# EAGLE board Source dc voltage and dc current (EAGLE 9.6.2)
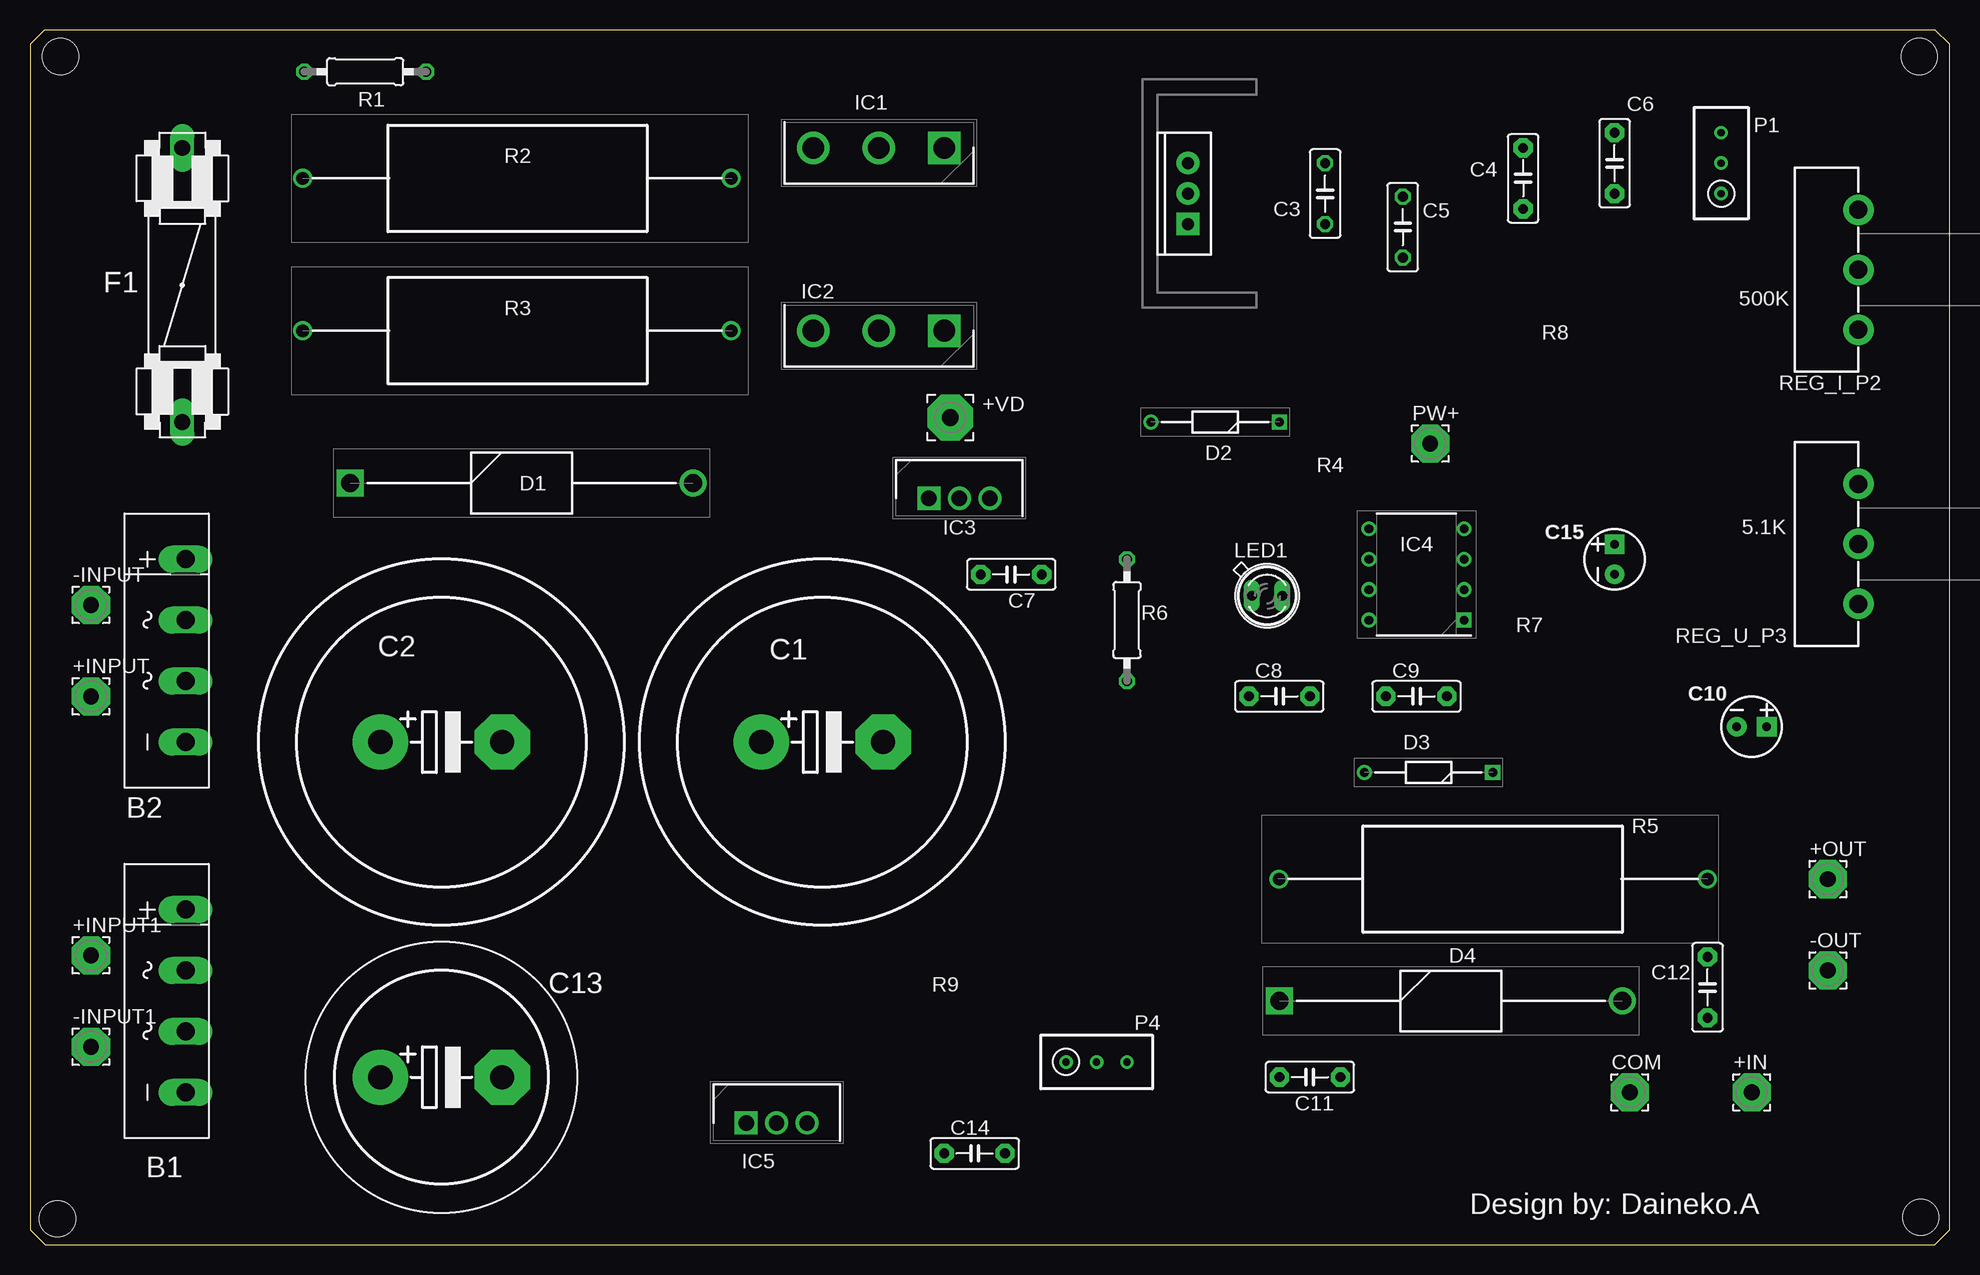
[diagram p0: board, top side]
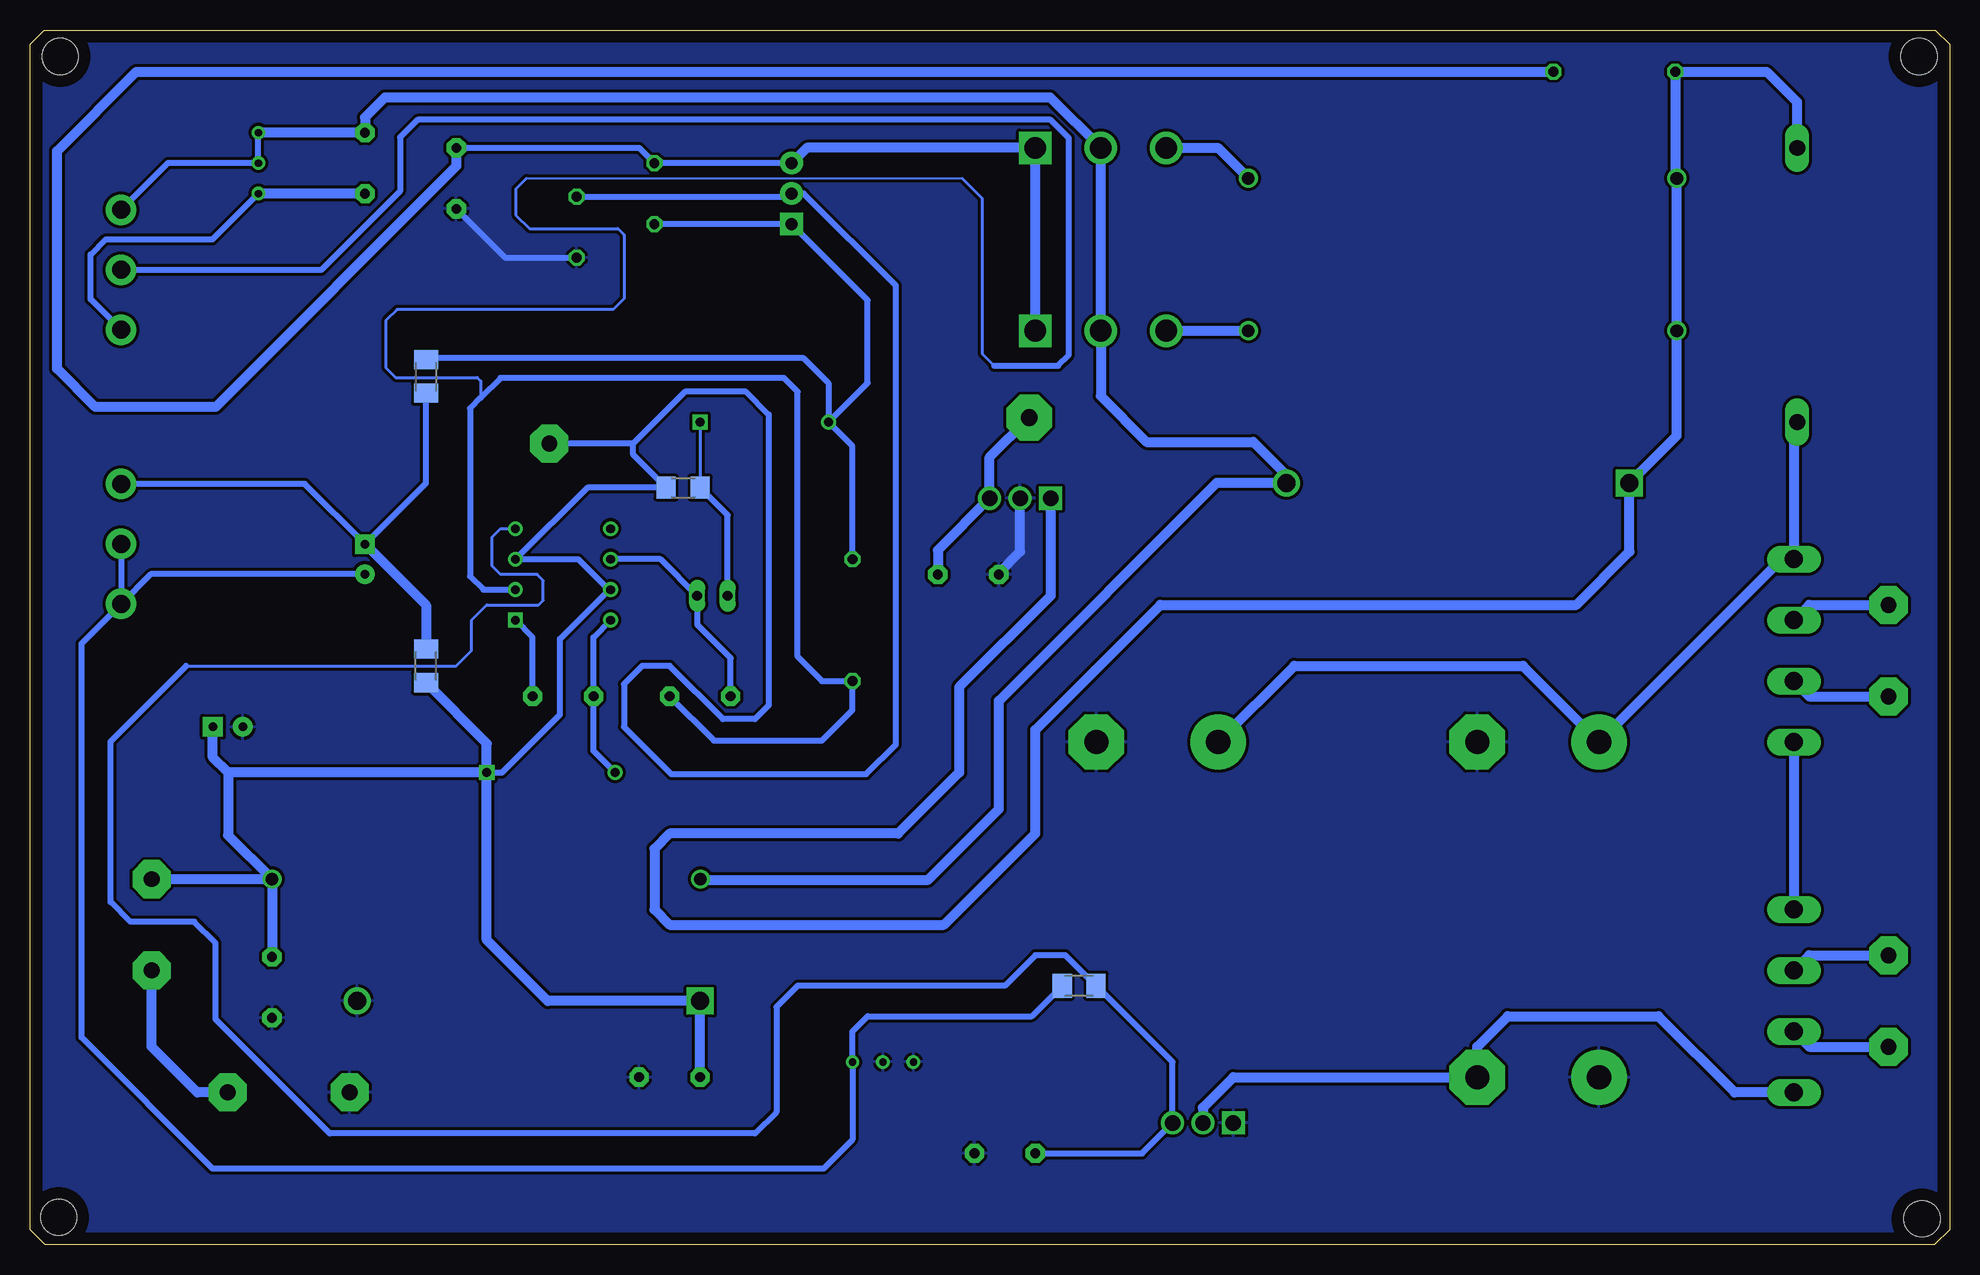
[diagram p1: board, bottom side, seen from below]

Size 160 x 101.27 mm. Coordinates in mm from the lower left corner, seen from the top.
Outline: 0,100.08 0,1.27 1.27,0 158.75,0 160,1.25 160,100.1 158.83,101.27 1.19,101.27 0,100.08
Copper layers (1*16): Top 0.035mm / dielectric 1.5mm / Bottom 0.035mm
Design rules "default *": minimum track width 6mil, minimum drill 0.35mm, track to track 10mil, track to pad 10mil, pad to pad 8mil, via to via 6mil, smd to smd 10mil, copper to edge 40mil, drill to drill 6mil, minimum pad ring 10mil, minimum via ring 8mil, stop-mask expansion 4mil, vias tented up to drill 0mil, thermal gap 10mil
Holes 3 mm at 157.48,99.06 2.54,99.06 157.61,2.29 2.29,2.16

## Footprints (pad centres in the part's own frame; a part is rotated, then mirrored left to right if it is on the bottom)
3,17/1,3 = drill 1.321 pad 3.175 octagon: 1 0,0
3,81/1,4 = drill 1.397 pad 3.81 octagon: 1 0,0
FBU4 = drill 1.499 long: + 7.62,-1.54; - -7.62,-1.54; AC1 2.54,-1.54; AC2 -2.54,-1.54
EB30D = drill 2.007 pad 4.597: + -5.08,0 | drill 2.007 pad 4.597 octagon: - 5.08,0
C050-025X075 = drill 0.813 octagon: 1 -2.54,0; 2 2.54,0
C5B2.5 = drill 0.813 pad 1.6 octagon: 1 -2.54,0; 2 2.54,0
CPOL-RADIAL-2.5MM-5MM = drill 0.7 pad 1.651 square: 1 1.25,0 | drill 0.7 pad 1.651: 2 -1.25,0
EB22,5D = drill 2.007 pad 4.597: + -5.08,0 | drill 2.007 pad 4.597 octagon: - 5.08,0
DIOAD2860W130L840D505 = drill 1.5 pad 2.25 square: 1 0,0 | drill 1.5 pad 2.25: 2 28.6,0
DIOAD1068W53L380D172 = drill 0.75 pad 1.15 square: 1 0,0 | drill 0.75 pad 1.15: 2 10.7,0
FUSE = drill 1.321 long: 1 -11.43,0; 2 11.43,0
TO545P515X1560X2445-3P = drill 1.81 pad 2.715 square: 1 0,0 | drill 1.81 pad 2.715: 2 5.45,0; 3 10.9,0
TO254P470X1028X1955-3P = drill 1.29 pad 1.935 square: 1 0,0 | drill 1.29 pad 1.935: 2 2.54,0; 3 5.08,0
DIP794W53P254L959H508Q8N = drill 0.73 pad 1.13 square: 1 -3.97,3.81 | drill 0.73 pad 1.13: 2 -3.97,1.27; 3 -3.97,-1.27; 4 -3.97,-3.81; 5 3.97,-3.81; 6 3.97,-1.27; 7 3.97,1.27; 8 3.97,3.81
SFH482 = drill 0.813 long: A -1.27,0; K 1.27,0
RTRIM3296W = drill 0.61: 1 0,-2.54; 2 0,0; 3 0,2.54
0207/10 = drill 0.813 octagon: 1 -5.08,0; 2 5.08,0
RESAD6200W85L2200D1000 = drill 1.05 pad 1.575: 1 -0.127,0; 2 35.584,0
R1206 = smd 1.6 x 1.803: 1 -1.422,0; 2 1.422,0
M1206 = smd 1.6 x 2: 1 -1.4,0; 2 1.4,0
POT_ALPHA_RV16AF-20 = drill 1.5 pad 2.54: 1 -5,0; 2 0,0; 3 5,0
TO220-ADJ = drill 1 pad 1.88 square: ADJ -2.54,0 | drill 1 pad 1.88: IN 2.54,0; OUT 0,0

## Placement (x,y rotation side)
+IN  [3,17/1,3]  143.51,12.7 0 top
+INPUT  [3,17/1,3]  5.08,45.72 0 top
+INPUT1  [3,17/1,3]  5.08,24.13 0 top
+OUT  [3,17/1,3]  149.86,30.48 0 top
+VD  [3,81/1,4]  76.71,68.96 270 top
-INPUT  [3,17/1,3]  5.08,53.34 0 top
-INPUT1  [3,17/1,3]  5.08,16.51 0 top
-OUT  [3,17/1,3]  149.86,22.86 0 top
B1  [FBU4]  11.43,20.32 90 top
B2  [FBU4]  11.43,49.53 90 top
C1  10000uF  [EB30D]  66.04,41.91 0 top
C2  10000uF  [EB30D]  34.29,41.91 0 top
C3  68n  [C050-025X075]  107.95,87.63 270 top
C4  0.33uF  [C5B2.5]  124.46,88.9 90 top
C5  1.0uF  [C050-025X075]  114.43,84.84 90 top
C6  100pF  [C5B2.5]  132.08,90.17 270 top
C7  0.1uF  [C5B2.5]  81.79,55.88 180 top
C8  100pF  [C5B2.5]  104.14,45.72 0 top
C9  100pF  [C5B2.5]  115.57,45.72 0 top
C10  10uF  [CPOL-RADIAL-2.5MM-5MM]  143.51,43.18 0 top
C11  0.22uF  [C5B2.5]  106.68,13.97 180 top
C12  10nF  [C5B2.5]  139.83,21.46 270 top
C13  1000uF  [EB22,5D]  34.29,13.97 0 top
C14  0.1uF  [C5B2.5]  78.74,7.62 0 top
C15  10uF  [CPOL-RADIAL-2.5MM-5MM]  132.08,57.15 90 top
COM  [3,17/1,3]  133.35,12.7 0 top
D1  1N5408RLG  [DIOAD2860W130L840D505]  26.67,63.5 0 top
D2  1N914  [DIOAD1068W53L380D172]  104.14,68.58 180 top
D3  1N914  [DIOAD1068W53L380D172]  121.92,39.37 180 top
D4  1N5408RLG  [DIOAD2860W130L840D505]  104.14,20.32 0 top
F1  [FUSE]  12.7,80.01 90 top
IC1  TIP35C  [TO545P515X1560X2445-3P]  76.2,91.44 180 top
IC2  TIP35C  [TO545P515X1560X2445-3P]  76.2,76.2 180 top
IC3  LM7812CT_NOPB  [TO254P470X1028X1955-3P]  74.93,62.23 0 top
IC4  LM301AN_NOPB  [DIP794W53P254L959H508Q8N]  115.57,55.88 180 top
IC5  LM7905CT_NOPB  [TO254P470X1028X1955-3P]  59.69,10.16 0 top
LED1  SFH482  [SFH482]  103.12,54.1 0 top
P1  470K  [RTRIM3296W]  140.97,90.17 0 top
P4  100  [RTRIM3296W]  88.9,15.24 270 top
PW+  [3,17/1,3]  116.71,66.8 0 top
R1  30 2W  [0207/10]  27.94,97.79 0 top
R2  SQPW5R10J  [RESAD6200W85L2200D1000]  22.86,88.9 0 top
R3  SQPW5R10J  [RESAD6200W85L2200D1000]  22.86,76.2 0 top
R4  680  [R1206]  105.56,63.12 180 bottom
R5  SQPW5R10J  [RESAD6200W85L2200D1000]  139.7,30.48 180 top
R6  330 2W  [0207/10]  91.44,52.07 270 top
R7  220  [M1206]  127,48.26 270 bottom
R8  220  [M1206]  127,72.39 90 bottom
R9  200  [M1206]  72.55,21.59 0 bottom
REG_I_P2  500K  [POT_ALPHA_RV16AF-20]  152.4,81.28 90 top
REG_U_P3  5.1K  [POT_ALPHA_RV16AF-20]  152.4,58.42 90 top
U1  V_REG_317SINK  [TO220-ADJ]  96.52,87.63 90 top

## Library data of the parts
+IN +INPUT +INPUT1 +OUT +VD -INPUT -INPUT1 -OUT COM PW+ = wirepad
B1 B2 = rectifier
C1-C3 C5 C13 = rcl; SPICEPREFIX: C
C4 C6-C9 C11 C12 C14 = capacitor-wima
C10 C15 = SparkFun-Capacitors; PROD_ID: CAP-08440
D1 D4 = SamacSys_Parts; ARROW_PART_NUMBER: 1N5408RLG; ARROW_PRICE-STOCK: https://www.arrow.com/en/products/1n5408rlg/on-semiconductor; HEIGHT: mm; MANUFACTURER_NAME: ON Semiconductor; MANUFACTURER_PART_NUMBER: 1N5408RLG; MOUSER_PART_NUMBER: 863-1N5408RLG; MOUSER_PRICE-STOCK: https://www.mouser.co.uk/ProductDetail/ON-Semiconductor/1N5408RLG?qs=y2kkmE52mdN24wKCVTkxVw%3D%3D
D2 D3 = SamacSys_Parts; ARROW_PART_NUMBER: 1N914; ARROW_PRICE-STOCK: https://www.arrow.com/en/products/1n914/on-semiconductor; DESCRIPTION: Small Signal Diode; HEIGHT: mm; MANUFACTURER_NAME: ON Semiconductor; MANUFACTURER_PART_NUMBER: 1N914; MOUSER_PART_NUMBER: 512-1N914; MOUSER_PRICE-STOCK: https://www.mouser.co.uk/ProductDetail/ON-Semiconductor-Fairchild/1N914?qs=NSEUUqpg2uCfNuQFcxVZsA%3D%3D
F1 = special
IC1 IC2 = SamacSys_Parts; ARROW_PART_NUMBER: TIP35C; ARROW_PRICE-STOCK: https://www.arrow.com/en/products/tip35c/stmicroelectronics; DESCRIPTION: TIP35C, NPN Bipolar Transistor, 25 A 100 V HFE:10 3 MHz Power, 3-Pin TO-247; HEIGHT: 5.15mm; MANUFACTURER_NAME: STMicroelectronics; MANUFACTURER_PART_NUMBER: TIP35C; MOUSER_PART_NUMBER: 511-TIP35C; MOUSER_PRICE-STOCK: https://www.mouser.co.uk/ProductDetail/STMicroelectronics/TIP35C?qs=ljbEvF4DwOMWoKR%2FCFhSgA%3D%3D
IC3 = SamacSys_Parts; ARROW_PART_NUMBER: LM7812CT/NOPB; ARROW_PRICE-STOCK: https://www.arrow.com/en/products/lm7812ctnopb/texas-instruments; DESCRIPTION: Texas Instruments LM7812CT/NOPB Positive Voltage Regulator, 1A, 12 V 3-Pin, TO-220; HEIGHT: 4.7mm; MANUFACTURER_NAME: Texas Instruments; MANUFACTURER_PART_NUMBER: LM7812CT/NOPB; MOUSER_PART_NUMBER: 926-LM7812CT/NOPB; MOUSER_PRICE-STOCK: https://www.mouser.co.uk/ProductDetail/Texas-Instruments/LM7812CT-NOPB?qs=OYMYEaN9QmBofCpFKHiRuQ%3D%3D
IC4 = SamacSys_Parts; ARROW_PART_NUMBER: LM301AN/NOPB; ARROW_PRICE-STOCK: https://www.arrow.com/en/products/lm301annopb/texas-instruments; DESCRIPTION: Texas Instruments LM301AN/NOPB Op Amp, 8-Pin MDIP; HEIGHT: 5.08mm; MANUFACTURER_NAME: Texas Instruments; MANUFACTURER_PART_NUMBER: LM301AN/NOPB; MOUSER_PART_NUMBER: 926-LM301AN/NOPB; MOUSER_PRICE-STOCK: https://www.mouser.com/Search/Refine.aspx?Keyword=926-LM301AN%2FNOPB
IC5 = SamacSys_Parts; ARROW_PART_NUMBER: LM7905CT/NOPB; ARROW_PRICE-STOCK: https://www.arrow.com/en/products/lm7905ctnopb/texas-instruments; DESCRIPTION: Voltage regulator,LM7905CT -5V Texas Instruments LM7905CT/NOPB, Single Negative Voltage Regulator 1.5A -5 V, +/-4%, 3-Pin TO-220; HEIGHT: 4.7mm; MANUFACTURER_NAME: Texas Instruments; MANUFACTURER_PART_NUMBER: LM7905CT/NOPB; MOUSER_PART_NUMBER: 926-LM7905CT/NOPB; MOUSER_PRICE-STOCK: https://www.mouser.co.uk/ProductDetail/Texas-Instruments/LM7905CT-NOPB?qs=QbsRYf82W3EUyxHaqeuxKA%3D%3D
LED1 = led
P1 P4 = rcl; SPICEMODEL: X; SPICEPREFIXL: POT
R1 R4 R6-R9 = rcl; SPICEPREFIX: R
R2 R3 R5 = SamacSys_Parts; ARROW_PART_NUMBER: SQPW5R10J; ARROW_PRICE-STOCK: https://www.arrow.com/en/products/sqpw5r10j/te-connectivity; DESCRIPTION: Wirewound Resistors - Through Hole SQP5 R10 5% WIRE; HEIGHT: mm; MANUFACTURER_NAME: TE Connectivity; MANUFACTURER_PART_NUMBER: SQPW5R10J; MOUSER_PART_NUMBER: 279-SQPW5R10J; MOUSER_PRICE-STOCK: https://www.mouser.co.uk/ProductDetail/TE-Connectivity-Holsworthy/SQPW5R10J?qs=iJVBkmKXgrl0xB%2F8rZ4PHw%3D%3D
REG_I_P2 REG_U_P3 = SparkFun-Electromechanical
U1 = SparkFun-IC-Power

## Nets
12V: D1.1 F1.2 IC3.1 R1.1 R2.1 R3.1
GND: C1.- C2.- C4.1 C5.1 C7.2 C10.2 C11.1 C12.2 C13.+ C14.2 COM.1 D4.2 IC3.2 IC5.1 P4.1 P4.2
IN+: +OUT.1 C5.2 C10.1 C11.2 C12.1 D3.1 D4.1 IC4.3 IC4.7 PW+.1 R4.2 R5.1 R7.2 U1.OUT
IN-: C6.1 D1.2 IC1.2 IC2.2 P1.2 P1.3 R5.2 REG_I_P2.3
N$1: B2.+ C1.+ C2.+ F1.1
N$2: +VD.1 C7.1 IC3.3
N$3: B1.- C13.- IC5.2
N$4: +IN.1 -OUT.1
N$5: D2.1 LED1.A R4.1
N$6: IC1.3 R2.2
N$8: -INPUT.1 B2.AC1
N$9: IC2.3 R3.2
N$11: C6.2 P1.1 REG_I_P2.1
N$12: +INPUT.1 B2.AC2
N$13: -INPUT1.1 B1.AC2
N$14: +INPUT1.1 B1.AC1
N$16: C15.1 R7.1 R8.1 REG_U_P3.3
N$20: C3.1 C4.2 IC1.1 IC2.1 R1.2 U1.IN
N$25: C8.1 IC4.6 LED1.K
N$26: B1.+ B2.-
N$28: C15.2 P4.3 R9.1 REG_U_P3.1 REG_U_P3.2
N$39: C9.1 D3.2 IC4.8
N$40: C9.2 IC4.1
N$41: C8.2 IC4.2 R6.2 REG_I_P2.2
OUT: C3.2 D2.2 R6.1 R8.2 U1.ADJ
VE: C14.1 IC4.4 IC5.3 R9.2

## Tracks (layer width: path | path; a pad name or v marks a point on that pad's centre or on a via)
12V
  Bottom 0.813: F1.2 12.7,95.25 15.24,97.79 R1.1 22.86,89.03 R2.1 R3.1 22.73,67.44 D1.1 26.67,57.78 31.11,53.34 65.79,53.34 76.2,42.93 76.2,34.29 83.82,26.67 106.68,26.67 107.95,27.94 107.95,33.02 106.68,34.29 87.63,34.29 82.55,39.37 82.55,46.48 74.93,54.1 IC3.1
GND
  Bottom 0.508: C5.1 120.4,82.3 C4.1
  Bottom 0.813: IC3.2 77.47,57.78 79.25,56.01 C7.2
  pour Bottom: 1.27,0 0,1.27 0,98.93 2.29,101.22 157.86,101.22 160.02,99.06 160.02,1.27 158.75,0
IN+
  Bottom 0.152: 111.68,54.53 IC4.7 | IC4.3 119.51,57.15 119.38,57.15
  Bottom 0.254: 111.74,54.59 111.68,54.53 | U1.OUT 96.77,87.38
  Bottom 0.508: D3.1 120.65,39.37 115.82,44.2 115.82,50.51 111.74,54.59 114.3,57.15 119.38,57.15 | 119.51,57.15 113.54,63.12 R4.2 109.73,65.86 109.73,66.8 | U1.OUT 95.5,87.63 87.83,79.96 87.83,41.71 90.3,39.24 106.55,39.24 110.49,43.18 110.49,46.74 108.97,48.26 106.68,48.26 102.23,43.81 99.57,43.81 98.42,44.96 98.42,69.22 100.33,71.12 105.41,71.12 109.73,66.8 | C5.2 96.77,87.38 | 109.73,66.8 PW+.1
  Bottom 0.813: 143.49,39.37 144.76,40.64 C10.1 | 143.49,39.37 143.49,34.14 R5.1 | C11.2 D4.1 116.84,20.32 121.92,25.4 D3.1 | R5.1 C12.1 | D3.1 143.49,39.37 | D3.1 121.92,41.78 R7.2 | +OUT.1 R5.1
IN-
  Bottom 0.2: 55.27,64.16 D1.2
  Bottom 0.508: REG_I_P2.3 148.51,90.17 P1.2 P1.3
  Bottom 0.813: R5.2 104.06,30.43 85.14,30.43 79.25,36.32 79.25,45.34 61.09,63.5 D1.2 | P1.3 C6.1 132.08,93.98 130.43,95.63 74.94,95.63 IC1.2 IC2.2 70.75,70.75 66.93,66.93 58.04,66.93 55.27,64.16
N$1
  Bottom 0.813: C1.+ 54.61,48.26 35.56,48.26 C2.+ 13.97,57.15 B2.+ 12.97,68.31 F1.1
N$2
  Bottom 0.813: C7.1 84.33,57.91 IC3.3 80.01,65.66 +VD.1
N$3
  Bottom 0.813: IC5.2 62.23,11.43 59.69,13.97 C13.- 39.37,16.51 36.83,19.05 24.26,19.05 17.91,12.7 B1.-
N$4
  Bottom 0.813: +IN.1 146.05,12.7 149.86,16.51 -OUT.1
N$5
  Bottom 0.152: D2.1
  Bottom 0.254: D2.1 R4.1
  Bottom 0.508: R4.1 101.85,60.83 LED1.A
N$6
  Bottom 0.813: IC1.3 60.98,91.44 R2.2
N$8
  Bottom 0.813: B2.AC1 11.7,53.34 -INPUT.1
N$9
  Bottom 0.813: IC2.3 R3.2
N$11
  Bottom 0.508: REG_I_P2.1 154.94,78.82 154.94,82.55 153.67,83.82 144.78,83.82 P1.1
  Bottom 0.813: C6.2 P1.1
N$12
  Bottom 0.813: B2.AC2 11.7,45.72 +INPUT.1
N$13
  Bottom 0.813: B1.AC2 11.7,16.51 -INPUT1.1
N$14
  Bottom 0.813: B1.AC1 11.7,24.13 +INPUT1.1
N$16
  Bottom 0.508: R8.1 127,63.48 C15.1 137.1,63.42 REG_U_P3.3
  Bottom 0.813: C15.1 127,53.32 R7.1
N$20
  Bottom 0.508: C4.2 109.22,91.44 C3.1 U1.IN
  Bottom 0.813: R1.2 151.13,97.79 157.73,91.19 157.73,73.03 154.56,69.85 144.53,69.85 124.46,89.92 C4.2 | U1.IN 95.25,91.44 IC1.1 IC2.1
N$25
  Bottom 0.508: C8.1 101.6,48.9 104.39,51.69 LED1.K 107.44,57.15 IC4.6
N$26
  Bottom 0.813: B2.- B1.+
N$28
  Bottom 0.508: REG_U_P3.1 155.7,50.12 155.7,17.27 144.78,6.35 93.85,6.35 91.44,8.76 P4.3 91.44,17.78 90.17,19.05 76.49,19.05 R9.1 | C15.2 149.92,55.9 REG_U_P3.1 | REG_U_P3.2 REG_U_P3.1
N$39
  Bottom 0.508: D3.2 113.03,41.18 C9.1 113.03,50.64 IC4.8
N$40
  Bottom 0.508: C9.2 118.11,50.64 IC4.1
N$41
  Bottom 0.152: 118.62,88.9 82.3,88.9
  Bottom 0.254: 118.62,88.9 119.51,88.01 119.51,85.85 118.36,84.71 111,84.71 110.49,84.2 110.49,78.87 111.38,77.98 129.41,77.98 130.3,77.09 130.3,73.07 129.54,72.3 122.72,72.3 122.43,72.01 122.43,70.61 | 79.63,73.28 80.64,74.3 80.64,87.25 82.3,88.9
  Bottom 0.508: C8.2 103,42.04 93.98,42.04 91.44,44.58 R6.2 93.98,46.99 96.01,49.02 96.01,71.12 97.16,72.26 120.78,72.26 122.43,70.61 123.32,69.72 123.32,55.72 122.21,54.61 IC4.2 | REG_I_P2.2 135.71,81.28 129.16,87.83 129.16,92.33 127.7,93.79 74.93,93.79 73.41,92.26 73.41,74.17 74.3,73.28 79.63,73.28
OUT
  Bottom 0.152: 126.88,73.91 R8.2
  Bottom 0.508: D2.2 93.44,71.85 95.5,73.91 126.88,73.91 | D2.2 91.44,66.58 R6.1 | D2.2 90.17,71.85 90.17,78.74 U1.ADJ C3.2
VE
  Bottom 0.254: 146.99,48.26 124.46,48.26 123.19,49.53 123.19,52.07 121.92,53.34 117.6,53.34 117.22,53.72 117.22,55.37 117.73,55.88 120.78,55.88 121.46,56.57 121.46,59 120.78,59.69 IC4.4
  Bottom 0.508: C14.1 67.31,7.62 IC5.3 64.77,15.24 71.12,21.59 R9.2 73.69,24.13 76.2,24.13 78.74,21.59 96.01,21.59 97.79,19.81 97.79,11.05 99.57,9.27 135,9.27 144.53,18.8 144.53,25.15 146.3,26.92 151.64,26.92 153.29,28.57 153.29,41.96 146.99,48.26

## Text on the board
tNames: Design by: Daineko.A